# Altium PCB CM5IO.PcbDoc (part 3 of 4)
Units mm, origin at the board's own origin, x right, y up, seen from the top; angles counter-clockwise.
Board outline 160 x 90 mm, 4 copper layers (F.Cu, In1.Cu, In2.Cu, B.Cu); 76 components, 212 nets, 672 pads, 703 vias.
Unrouted connection lines stored in the file: 4.
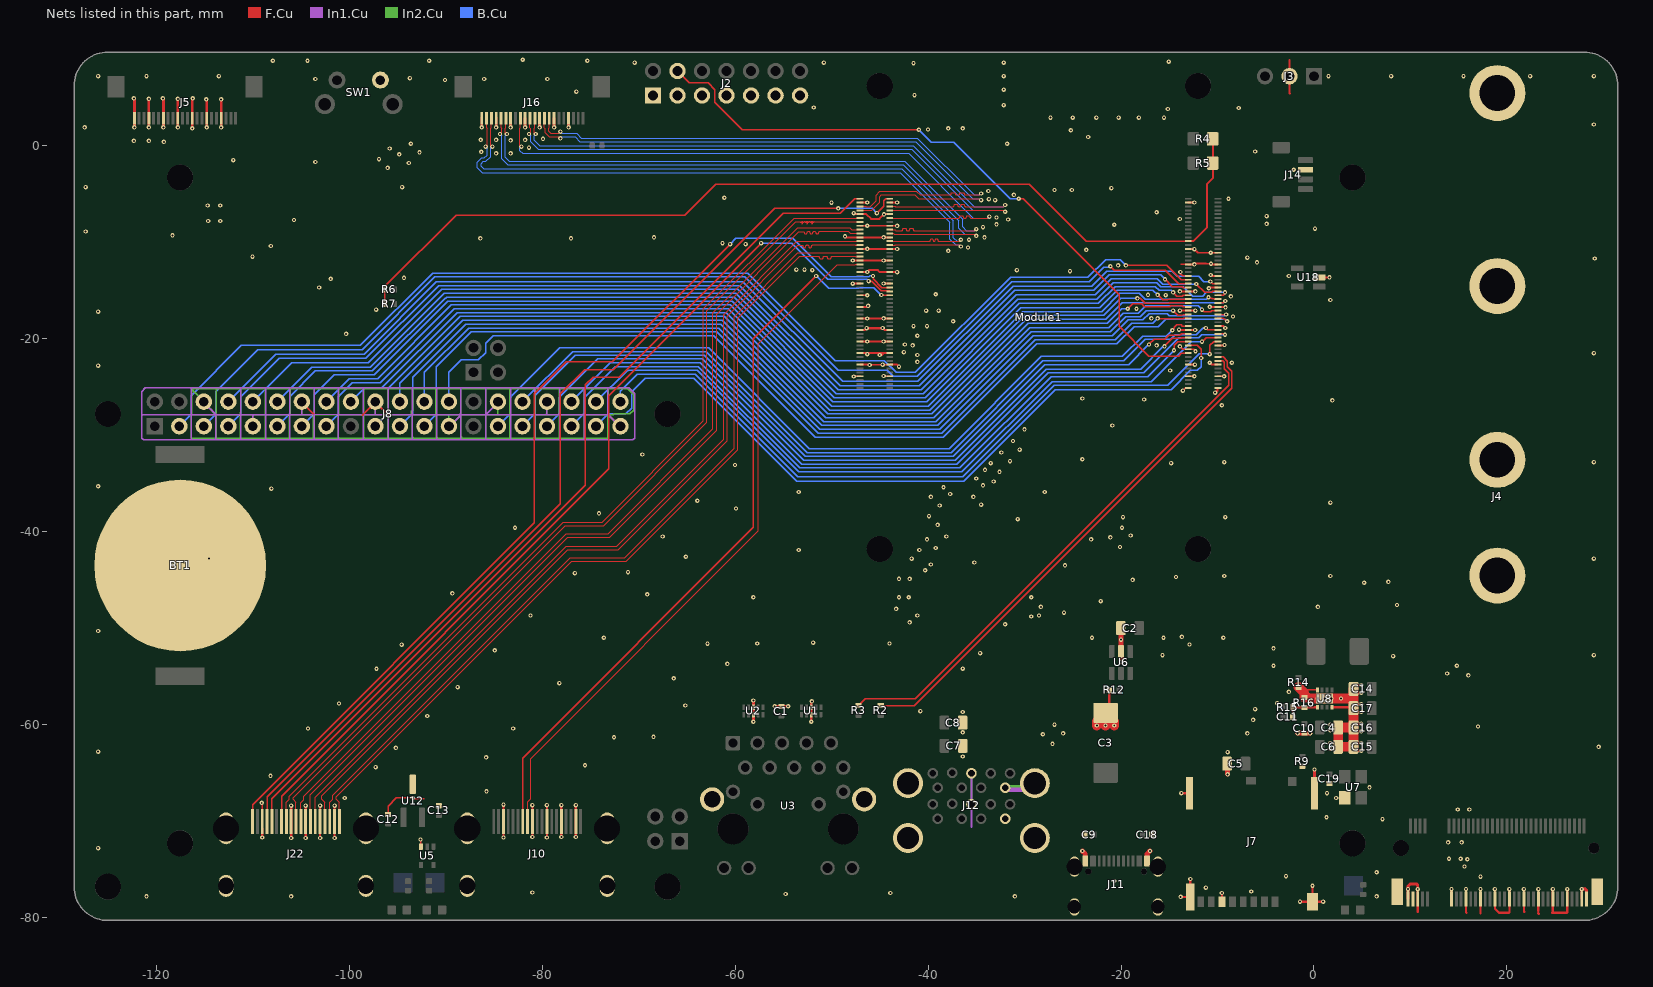
[diagram p4: the nets of this part, all layers, seen from the top]

## Via types
v1: diameter 0.45, hole 0.2, F.Cu to B.Cu, tented both sides, 703 vias

## Nets (pads, with @x,y where several pads share a name; then routed paths per layer and width w, separated by ;. In a path a pad name is that pad's centre, name@x,y a point inside that pad or via, vN(x,y) a via of type N, cw(c..) or ccw(c..) an arc to the next point about the centre after c; other vN are vias at no path point) (continued)
DPHY1_C_P: J16.9 Module1.189 | length 66.1
  F.Cu w0.127: J16.9@-82.25,2.85 -82.25,1.875 -82.31,1.815 -82.31,0.06 v1(-82.15,-0.1) ; Module1.189@-43.92,-7.5 -43.395,-7.5 -43.385,-7.51 -36.84,-7.51 -36.812,-7.507 -36.786,-7.498 -36.762,-7.483 -36.742,-7.463 -36.727,-7.439 -36.718,-7.413 -36.712,-7.357 -36.703,-7.331 -36.688,-7.307 -36.668,-7.287 -36.644,-7.272 -36.618,-7.263 -36.59,-7.26 -36.49,-7.26 -36.462,-7.263 -36.436,-7.272 -36.412,-7.287 -36.392,-7.307 -36.377,-7.331 -36.368,-7.357 -36.362,-7.413 -36.353,-7.439 -36.338,-7.463 -36.318,-7.483 -36.294,-7.498 -36.268,-7.507 -36.24,-7.51 -36.14,-7.51 -36.112,-7.507 -36.086,-7.498 -36.062,-7.483 -36.042,-7.463 -36.027,-7.439 -36.018,-7.413 -36.012,-7.357 -36.003,-7.331 -35.988,-7.307 -35.968,-7.287 -35.944,-7.272 -35.918,-7.263 -35.89,-7.26 -35.79,-7.26 -35.762,-7.263 -35.736,-7.272 -35.712,-7.287 -35.692,-7.307 -35.677,-7.331 -35.668,-7.357 -35.662,-7.413 -35.653,-7.439 -35.638,-7.463 -35.618,-7.483 -35.594,-7.498 -35.568,-7.507 -35.54,-7.51 -33.81,-7.51 v1(-33.65,-7.35)
  B.Cu w0.127: v1(-82.15,-0.1) -82.31,-0.26 -82.31,-0.521 -82.021,-0.81 -42.021,-0.81 -35.321,-7.51 -33.81,-7.51 v1(-33.65,-7.35)
DPHY1_D0_N: J16.2 Module1.175 | length 67.7
  F.Cu w0.127: v1(-85.85,-0.1) -85.69,0.06 -85.69,1.815 -85.75,1.875 J16.2@-85.75,2.85 ; Module1.175@-43.92,-10.3 -43.395,-10.3 -43.385,-10.29 -36.76,-10.29 v1(-36.6,-10.45)
  B.Cu w0.127: v1(-85.85,-0.1) -85.69,-0.26 -85.69,-0.971 -85.979,-1.26 -86.229,-1.26 -86.69,-1.721 -86.69,-2.279 -86.179,-2.79 -42.879,-2.79 -37.74,-7.929 -37.74,-9.679 -37.129,-10.29 -36.76,-10.29 v1(-36.6,-10.45)
DPHY1_D0_P: J16.3 Module1.177 | length 67.7
  F.Cu w0.127: J16.3@-85.25,2.85 -85.25,1.875 -85.31,1.815 -85.31,0.06 v1(-85.15,-0.1) ; Module1.177@-43.92,-9.9 -43.395,-9.9 -43.385,-9.91 -39.87,-9.91 -39.842,-9.907 -39.816,-9.898 -39.792,-9.883 -39.772,-9.863 -39.757,-9.839 -39.748,-9.813 -39.742,-9.757 -39.733,-9.731 -39.718,-9.707 -39.698,-9.687 -39.674,-9.673 -39.648,-9.663 -39.62,-9.66 -39.61,-9.66 -39.582,-9.663 -39.556,-9.673 -39.532,-9.687 -39.512,-9.707 -39.497,-9.731 -39.488,-9.757 -39.482,-9.813 -39.473,-9.839 -39.458,-9.863 -39.438,-9.883 -39.414,-9.898 -39.388,-9.907 -39.36,-9.91 -39.37,-9.91 -39.342,-9.907 -39.316,-9.898 -39.292,-9.883 -39.272,-9.863 -39.257,-9.839 -39.248,-9.813 -39.242,-9.757 -39.233,-9.731 -39.218,-9.707 -39.198,-9.687 -39.174,-9.673 -39.148,-9.663 -39.12,-9.66 -39.11,-9.66 -39.082,-9.663 -39.056,-9.673 -39.032,-9.687 -39.012,-9.707 -38.997,-9.731 -38.988,-9.757 -38.982,-9.813 -38.973,-9.839 -38.958,-9.863 -38.938,-9.883 -38.914,-9.898 -38.888,-9.907 -38.86,-9.91 -36.76,-9.91 v1(-36.6,-9.75)
  B.Cu w0.127: v1(-85.15,-0.1) -85.31,-0.26 -85.31,-1.129 -85.821,-1.64 -86.071,-1.64 -86.31,-1.879 -86.31,-2.121 -86.021,-2.41 -42.721,-2.41 -37.36,-7.771 -37.36,-9.521 -36.971,-9.91 -36.76,-9.91 v1(-36.6,-9.75)
DPHY1_D1_N: J16.5 Module1.181 | length 66.4
  F.Cu w0.127: v1(-84.35,1.2) -84.19,1.36 -84.19,1.815 -84.25,1.875 J16.5@-84.25,2.85 ; Module1.181@-43.96,-9.1 -43.589,-9.1 -43.579,-9.09 -43.479,-9.19 -35.16,-9.19 v1(-35,-9.35)
  B.Cu w0.127: v1(-84.35,1.2) -84.19,1.04 -84.19,-1.379 -83.579,-1.99 -42.579,-1.99 -36.79,-7.779 -36.79,-8.579 -36.179,-9.19 -35.16,-9.19 v1(-35,-9.35)
DPHY1_D1_P: J16.6 Module1.183 | length 66.3
  F.Cu w0.127: J16.6@-83.75,2.85 -83.75,1.875 -83.81,1.815 -83.81,1.36 v1(-83.65,1.2) ; Module1.183@-43.96,-8.7 -43.67,-8.7 -43.66,-8.71 -43.421,-8.71 -43.321,-8.81 -42.74,-8.81 -42.713,-8.807 -42.687,-8.798 -42.664,-8.783 -42.644,-8.764 -42.63,-8.741 -42.62,-8.715 -42.614,-8.66 -42.605,-8.634 -42.591,-8.611 -42.571,-8.592 -42.548,-8.577 -42.522,-8.568 -42.495,-8.565 -42.38,-8.565 -42.353,-8.568 -42.327,-8.577 -42.304,-8.592 -42.284,-8.611 -42.27,-8.634 -42.26,-8.66 -42.254,-8.715 -42.245,-8.741 -42.231,-8.764 -42.211,-8.783 -42.188,-8.798 -42.162,-8.807 -42.135,-8.81 -42.02,-8.81 -41.993,-8.807 -41.967,-8.798 -41.944,-8.783 -41.924,-8.764 -41.91,-8.741 -41.9,-8.715 -41.894,-8.66 -41.885,-8.634 -41.871,-8.611 -41.851,-8.592 -41.828,-8.577 -41.802,-8.568 -41.775,-8.565 -41.66,-8.565 -41.633,-8.568 -41.607,-8.577 -41.584,-8.592 -41.564,-8.611 -41.55,-8.634 -41.54,-8.66 -41.534,-8.715 -41.525,-8.741 -41.511,-8.764 -41.491,-8.783 -41.468,-8.798 -41.442,-8.807 -41.415,-8.81 -35.16,-8.81 v1(-35,-8.65)
  B.Cu w0.127: v1(-83.65,1.2) -83.81,1.04 -83.81,-1.221 -83.421,-1.61 -42.421,-1.61 -36.41,-7.621 -36.41,-8.421 -36.021,-8.81 -35.16,-8.81 v1(-35,-8.65)
DPHY1_D2_N: J16.11 Module1.193 | length 66.8
  F.Cu w0.127: v1(-81.35,1.2) -81.19,1.36 -81.19,1.815 -81.25,1.875 J16.11@-81.25,2.85 ; Module1.193@-43.92,-6.7 -43.395,-6.7 -43.385,-6.69 -32.16,-6.69 v1(-32,-6.85)
  B.Cu w0.127: v1(-81.35,1.2) -81.19,1.04 -81.19,0.421 -80.379,-0.39 -41.679,-0.39 -35.379,-6.69 -32.16,-6.69 v1(-32,-6.85)
DPHY1_D2_P: J16.12 Module1.195 | length 66.7
  F.Cu w0.127: J16.12@-80.75,2.85 -80.75,1.875 -80.81,1.815 -80.81,1.36 v1(-80.65,1.2) ; Module1.195@-43.92,-6.3 -43.395,-6.3 -43.385,-6.31 -37.41,-6.31 -37.382,-6.307 -37.356,-6.298 -37.332,-6.283 -37.312,-6.263 -37.297,-6.239 -37.288,-6.213 -37.282,-6.157 -37.273,-6.131 -37.258,-6.107 -37.238,-6.087 -37.214,-6.072 -37.188,-6.063 -37.16,-6.06 -37.06,-6.06 -37.032,-6.063 -37.006,-6.072 -36.982,-6.087 -36.962,-6.107 -36.947,-6.131 -36.938,-6.157 -36.932,-6.213 -36.923,-6.239 -36.908,-6.263 -36.888,-6.283 -36.864,-6.298 -36.838,-6.307 -36.81,-6.31 -36.71,-6.31 -36.682,-6.307 -36.656,-6.298 -36.632,-6.283 -36.612,-6.263 -36.597,-6.239 -36.588,-6.213 -36.582,-6.157 -36.573,-6.131 -36.558,-6.107 -36.538,-6.087 -36.514,-6.072 -36.488,-6.063 -36.46,-6.06 -36.36,-6.06 -36.332,-6.063 -36.306,-6.072 -36.282,-6.087 -36.262,-6.107 -36.247,-6.131 -36.238,-6.157 -36.232,-6.213 -36.223,-6.239 -36.208,-6.263 -36.188,-6.283 -36.164,-6.298 -36.138,-6.307 -36.11,-6.31 -32.16,-6.31 v1(-32,-6.15)
  B.Cu w0.127: v1(-80.65,1.2) -80.81,1.04 -80.81,0.579 -80.221,-0.01 -41.521,-0.01 -35.221,-6.31 -32.16,-6.31 v1(-32,-6.15)
DPHY1_D3_N: J16.14 Module1.194 | length 63.5
  F.Cu w0.127: J16.14@-79.75,2.85 -79.75,1.875 -79.69,1.815 -79.69,1.321 -79.279,0.91 -78.26,0.91 v1(-78.1,0.75) ; Module1.194@-47,-6.7 -46.475,-6.7 -46.465,-6.69 -45.821,-6.69 -45.01,-5.879 -45.01,-5.279 -44.821,-5.09 -41.379,-5.09 -40.979,-5.49 -34.66,-5.49 v1(-34.5,-5.65)
  B.Cu w0.127: v1(-78.1,0.75) -77.94,0.91 -76.579,0.91 -76.079,0.41 -41.279,0.41 -35.379,-5.49 -34.66,-5.49 v1(-34.5,-5.65)
DPHY1_D3_P: J16.15 Module1.196 | length 63.5
  F.Cu w0.127: J16.15@-79.25,2.85 -79.25,1.875 -79.31,1.815 -79.31,1.479 -79.121,1.29 -78.26,1.29 v1(-78.1,1.45) ; Module1.196@-47,-6.3 -46.475,-6.3 -46.465,-6.31 -45.979,-6.31 -45.39,-5.721 -45.39,-5.121 -44.979,-4.71 -41.221,-4.71 -40.821,-5.11 -37.74,-5.11 -37.712,-5.107 -37.686,-5.098 -37.662,-5.083 -37.642,-5.063 -37.627,-5.039 -37.618,-5.013 -37.612,-4.957 -37.603,-4.931 -37.588,-4.907 -37.568,-4.887 -37.544,-4.872 -37.518,-4.863 -37.49,-4.86 -37.29,-4.86 -37.262,-4.863 -37.236,-4.872 -37.212,-4.887 -37.192,-4.907 -37.177,-4.931 -37.168,-4.957 -37.162,-5.013 -37.153,-5.039 -37.138,-5.063 -37.118,-5.083 -37.094,-5.098 -37.068,-5.107 -37.04,-5.11 -36.84,-5.11 -36.812,-5.107 -36.786,-5.098 -36.762,-5.083 -36.742,-5.063 -36.727,-5.039 -36.718,-5.013 -36.712,-4.957 -36.703,-4.931 -36.688,-4.907 -36.668,-4.887 -36.644,-4.872 -36.618,-4.863 -36.59,-4.86 -36.39,-4.86 -36.362,-4.863 -36.336,-4.872 -36.312,-4.887 -36.292,-4.907 -36.277,-4.931 -36.268,-4.957 -36.262,-5.013 -36.253,-5.039 -36.238,-5.063 -36.218,-5.083 -36.194,-5.098 -36.168,-5.107 -36.14,-5.11 -34.66,-5.11 v1(-34.5,-4.95)
  B.Cu w0.127: v1(-78.1,1.45) -77.94,1.29 -76.421,1.29 -75.921,0.79 -41.121,0.79 -35.221,-5.11 -34.66,-5.11 v1(-34.5,-4.95)
EEPROM_nWP: J2.4 Module1.20 | length 67.9
  F.Cu w0.13: J2.4@-65.96,7.74 -64.72,6.5 -62.8,6.5 -62.1,5.8 -62.1,4.5 -59.25,1.65 v1(-40.95,1.65) ; v1(-30.6,-5.5) -30.15,-5.5 -20.2,-15.45 -20.2,-18.7 -17.1,-21.8 -14.04,-21.8 -13.74,-21.5 Module1.20@-13.08,-21.5
  B.Cu w0.13: v1(-40.95,1.65) -39.65,0.35 -37.35,0.35 -31.48,-5.52 -30.62,-5.52 v1(-30.6,-5.5)
ETH_LEDG: Module1.17 R2.2 | length 54.2
  F.Cu w0.13: R2.2@-44.9,-58.03 -41.408,-58.03 -8.5,-25.122 -8.5,-23.4 -9,-22.9 -9,-22.318 -9.418,-21.9 Module1.17@-10,-21.9
ETH_LEDY: Module1.15 R3.2 | length 55.4
  F.Cu w0.13: R3.2@-47.2,-58 -46.5,-57.3 -41.3,-57.3 -8.82,-24.82 -8.82,-23.58 -9.3,-23.1 -9.3,-22.47 -9.47,-22.3 Module1.15@-10,-22.3
FB: C11.2 R15.2 R16.1 U8.1 | length 3.5
  F.Cu w0.23: C11.2@-2.215,-59.2 R15.2@-2.215,-58.2 ; R15.2@-2.2,-58.2 -1,-58.2 U8.1@0.35,-58.2
GND: BT1.2 C1.2 C2.2 C3.2 C4.2 C5.2 C6.2 C7.2 C8.2 C9.2 C10.2 C12.2 C13.2 C14.2 C15.2 C16.2 C17.2 C18.2 C19.2 J2.1 J2.3 J2.5 J2.7 J2.9 J2.11 J2.13 J3.2 J4.1 J4.3 J4.9 J4.15 J4.21 J4.27 J4.33 J4.39 J4.45 J4.51 J4.57 J4.71 J4.73 J4.75 J4.M1 J4.M2 J4.M3 J4.M4 J4.S1 J4.S2 J5.1 J5.4 J5.7 J5.10 J5.13 J5.16 J5.19 J7.6 J7.11 J8.6 J8.9 J8.14 J8.20 J8.25 J8.30 J8.34 J8.39 J10.2 J10.5 J10.8 J10.11 J10.17 J10.SH1 J10.SH2 J10.SH3 J10.SH4 J11.A1 J11.A12 J11.B1 J11.B12 J11.S1 J12.10 J12.A4 J12.A7 J12.B4 J12.B7 J14.3 J16.1 J16.4 J16.7 J16.10 J16.13 J16.16 J16.19 J22.2 J22.5 J22.8 J22.11 J22.17 J22.SH1 J22.SH2 J22.SH3 J22.SH4 Module1.1 Module1.2 Module1.7 Module1.8 Module1.13 Module1.14 Module1.22 Module1.23 Module1.32 Module1.33 Module1.42 Module1.43 Module1.52 Module1.53 Module1.59 Module1.60 Module1.65 Module1.66 Module1.71 Module1.74 Module1.98 Module1.107 Module1.108 Module1.113 Module1.114 Module1.119 Module1.120 Module1.125 Module1.126 Module1.131 Module1.132 Module1.137 Module1.138 Module1.144 Module1.150 Module1.155 Module1.156 Module1.161 Module1.162 Module1.167 Module1.168 Module1.173 Module1.174 Module1.179 Module1.180 Module1.185 Module1.186 Module1.191 Module1.192 Module1.197 Module1.198 R9.2 R12.2 R14.2 R16.2 SW1.2 U1.3 U1.8 U2.3 U2.8 U3.19 U3.20 U5.3 U6.2 U7.2 U8.4 U8.8 U8.9 U12.3 U18.2 | length 766.8
  F.Cu w0.13: v1(-109.05,-68.113) -109,-68.163 J22.17@-109,-70.02 ; C12.2@-95.95,-69.315 -95.95,-68.45 -95.1,-67.6 v1(-93.4,-67.6) -93.3,-67.7 -92.215,-67.7 ; v1(-92.6,-71.9) -92.55,-71.95 U5.3@-92.55,-72.65 ; v1@-46.3,-16.7 v1(-46.2,-16.6) ; v1(-46.05,-22.725) -46.025,-22.7 -45.65,-22.7 Module1.113@-43.92,-22.7 ; v1(-13.855,-13.1) -13.855,-13.252 -13.607,-13.5 Module1.60@-13.08,-13.5 ; -13.8,-12.3 Module1.66@-13.04,-12.3 ; v1@-10.9,-22.4 v1(-10.8,-22.5) ; J7.6@-9.55,-78.865 -9.55,-77.768 v1(-9.55,-77.45) ; -9.5,-18.7 -9.4,-18.7 ; -1,-56.7 -0.7,-56.4 U8.8@0.35,-56.4
  F.Cu w0.2: v1(-48.6,-9.4) -48.5,-9.5 -47,-9.5 v1(-44.6,-9.5) Module1.179@-43.9,-9.5 ; v1(-47.8,-14.3) Module1.156@-47,-14.3 ; v1(-47.8,-11.9) -47,-11.9 v1(-44.6,-11.9) Module1.167@-43.92,-11.9 ; v1(-47.7,-23.93) -47.67,-23.9 Module1.108@-47,-23.9 ; v1(-47.7,-7) -47.6,-7.1 -47,-7.1 -46.4,-7.1 -45.9,-7.6 -45.046,-7.6 v1(-44.561,-7.115) -44.546,-7.1 Module1.191@-43.9,-7.1 ; Module1.114@-47,-22.7 -46.075,-22.7 v1(-46.05,-22.725) ; Module1.120@-47,-21.5 -44.6,-21.5 ; Module1.126@-47,-20.3 v1(-46.3,-20.3) ; Module1.132@-47,-19.1 -46.539,-19.1 v1(-46.354,-18.916) ; Module1.138@-47,-17.9 -46.31,-17.9 v1(-46.3,-17.91) -46.29,-17.9 v1(-44.6,-17.9) Module1.137@-43.9,-17.9 ; Module1.150@-47,-15.5 v1(-46.3,-15.5) ; Module1.162@-47,-13.1 v1(-46.3,-13.1) -46.1,-12.9 -45.2,-12.9 -45,-13.1 Module1.161@-43.92,-13.1 ; Module1.174@-47,-10.7 v1(-46.3,-10.7) Module1.173@-43.92,-10.7 ; Module1.186@-47,-8.3 v1(-46.3,-8.3) Module1.185@-43.92,-8.3 ; Module1.198@-47,-5.9 -46.31,-5.9 v1(-46.3,-5.89) ; Module1.144@-46.85,-16.7 v1@-46.3,-16.7 ; v1(-45,-21.7) -44.8,-21.7 -44.6,-21.5 ; v1(-44.7,-18.9) -44.5,-19.1 Module1.131@-43.92,-19.1 ; v1(-44.6,-23.87) -44.57,-23.9 Module1.107@-43.9,-23.9 ; v1@-44.6,-20.29 -44.59,-20.3 Module1.125@-43.92,-20.3 ; v1(-44.598,-14.293) -44.591,-14.3 Module1.155@-43.9,-14.3 ; Module1.119@-43.92,-21.5 -44.6,-21.5 ; Module1.113@-43.9,-22.7 -43.2,-22.7 v1(-43,-22.9) ; Module1.161@-43.9,-13.1 -43.21,-13.1 v1(-43.2,-13.11) ; Module1.173@-43.9,-10.7 -43.21,-10.7 v1(-43.2,-10.71) ; Module1.185@-43.9,-8.3 -43.21,-8.3 v1(-43.2,-8.31) ; Module1.197@-43.9,-5.9 -43.21,-5.9 v1(-43.2,-5.89) ; v1(-13.983,-19.074) -13.957,-19.1 -13.08,-19.1 -12.322,-19.1 v1(-12.319,-19.097) ; v1(-13.9,-20.8) -13.6,-21.1 -13.08,-21.1 -12.48,-21.1 v1(-12.273,-21.307) ; v1(-13.9,-17.1) -13.08,-17.1 v1(-12.3,-17.1) ; v1(-13.9,-15.1) -13.08,-15.1 v1(-12.3,-15.1) ; v1(-13.587,-25.393) Module1.2@-13.294,-25.1 ; Module1.8@-13.08,-23.9 v1(-12.4,-23.9) ; Module1.14@-13.08,-22.7 v1@-12.4,-22.7 ; Module1.66@-13.08,-12.3 v1(-12.4,-12.3) -12.3,-12.2 -11.2,-12.2 -11.163,-12.237 v1(-10.675,-12.237) -10.611,-12.3 Module1.65@-10,-12.3 ; Module1.74@-13.08,-10.7 -12.42,-10.7 v1(-12.4,-10.72) -12.02,-11.1 v1(-10.7,-11.1) Module1.71@-10,-11.1 ; Module1.98@-13.08,-5.9 -12.415,-5.9 v1(-12.4,-5.885) ; v1(-10.9,-14.78) -10.82,-14.7 Module1.53@-10,-14.7 ; v1(-10.8,-22.5) -10.6,-22.7 Module1.13@-10,-22.7 ; v1(-10.8,-16.7) -10,-16.7 -9.224,-16.7 v1(-9.173,-16.751) ; v1(-10.7,-13.4) -10.6,-13.5 Module1.59@-10,-13.5 ; v1@-10.181,-25.555 -10,-25.374 Module1.1@-10,-25.1 ; Module1.7@-10,-23.9 v1(-9.305,-23.9) ; Module1.23@-10,-20.7 -9.319,-20.7 v1(-9.281,-20.662) ; Module1.33@-10,-18.7 -9.5,-18.7 ; -9.4,-18.7 v1(-9.2,-18.9)
  F.Cu w0.23: v1@-120.8,4.9 v1(-120.75,4.85) J5.4@-120.75,2.85 v1(-120.75,1.9) ; v1(-109,-71.7) J22.17@-109,-70.8 ; v1(-106,-71.75) v1(-106,-68.4) ; J8.14@-104.89,-26.58 -103.7,-27.77 ; v1(-104.5,-71.75) v1(-104.5,-68.4) ; v1@-103,-71.8 v1(-103,-68.4) ; v1@-101.5,-71.8 v1(-101.5,-68.4) ; -98.6,-27.9 -98.59,-27.9 -97.27,-26.58 -96.05,-27.8 -96,-27.8 ; v1(-84,-71.7) v1(-84,-68.3) ; v1(-81,-71.65) v1(-81,-68.35) ; v1(-79.5,-71.7) v1(-79.5,-68.35) ; v1(-78,-71.65) v1(-78,-68.35) ; v1(-76.5,-71.65) v1(-76.5,-68.35) ; v1(-46.354,-18.916) -44.716,-18.916 v1(-44.7,-18.9) ; v1(-46.3,-20.3) -44.61,-20.3 v1@-44.6,-20.29 ; C3.2@-21.6,-58.775 -21.21,-58.385 R12.2@-21.21,-56.4 ; v1(-13.82,-77.85) -13.795,-77.875 J7.11@-12.82,-77.875 ; v1(-13.75,-67.1) -13.74,-67.11 J7.11@-12.9,-67.11 ; v1(-9.55,-77.45) -9.54,-77.46 J7.6@-9.54,-78.375 ; -2.54,8.86 J3.2@-2.54,7.2 -2.54,5.44 -2.5,5.4 ; v1(-1.45,-78.35) J7.11@-0.17,-78.35 ; J7.11@-0.16,-78.36 0.94,-78.36 v1(0.95,-78.35) ; J7.11@-0.15,-78.35 v1(-0.15,-76.7) ; U18.2@0.5,-13.65 v1(1.6,-13.65) ; U8.4@1.85,-58.2 C17.2@4,-58.2 ; v1(4.9,-62.7) 4.5,-62.7 C15.2@4.1,-62.3 4.5,-61.9 v1(4.9,-61.9) ; v1(4.9,-60.7) 4.5,-60.7 C16.2@4.1,-60.3 4.5,-59.9 v1(4.9,-59.9) ; v1(4.9,-58.7) 4.488,-58.7 C17.2@4.088,-58.3 4.488,-57.9 v1(4.9,-57.9) ; v1(4.9,-56.7) 4.5,-56.7 C14.2@4.1,-56.3 4.5,-55.9 v1(4.9,-55.9) ; J4.57@14.25,-78.075 v1(14.25,-77.05) ; v1(15.75,-77.05) J4.51@15.75,-78.075 15.75,-79.45 15.8,-79.5 ; 17.25,-79.55 J4.45@17.25,-78.075 ; v1(18.75,-77.05) J4.39@18.75,-78.075 18.75,-79.08 19.17,-79.5 20.2,-79.5 20.25,-79.45 J4.33@20.25,-78.075 v1(20.25,-77.05) ; v1(21.75,-77.05) J4.27@21.75,-78.075 21.75,-79.35 21.8,-79.4 ; 23.25,-79.55 23.3,-79.6 ; 23.25,-79.3 J4.21@23.25,-78.075 ; v1(24.75,-77.05) J4.15@24.75,-78.075 24.75,-79.45 24.7,-79.5 26.2,-79.5 26.25,-79.45 J4.9@26.25,-78.075 v1(26.25,-77.05) ; J4.3@27.75,-78.075 v1(27.75,-77.05)
  F.Cu w0.3: v1(-122.3,4.9) -122.25,4.85 J5.1@-122.25,2.85 v1(-122.25,1.9) ; v1(-119.3,4.9) -119.25,4.85 J5.7@-119.25,2.85 v1(-119.25,1.9) ; v1@-117.8,4.9 v1(-117.75,4.85) J5.10@-117.75,2.85 v1(-117.75,1.9) ; v1(-116.25,1.8) J5.13@-116.25,2.85 -116.25,4.85 v1(-116.2,4.9) ; v1(-114.8,4.8) -114.75,4.75 J5.16@-114.75,2.85 v1(-114.75,1.9) ; v1(-113.25,1.9) J5.19@-113.25,2.85 v1(-113.25,4.8) ; v1(-86.25,1.9) J16.1@-86.25,2.85 ; v1(-84.75,1.9) J16.4@-84.75,2.85 ; v1(-83.25,1.9) J16.7@-83.25,2.85 ; v1(-81.75,1.9) J16.10@-81.75,2.85 ; v1(-80.25,1.9) J16.13@-80.25,2.85 ; v1(-78.75,1.9) J16.16@-78.75,2.85 ; v1(-77.25,1.9) J16.19@-77.25,2.85 ; v1(-58.1,-59.7) U2.8@-58.1,-58.97 v1(-58.1,-57.5) ; v1(-55.9,-58.1) -55.885,-58.115 -55.2,-58.115 -54.78,-58.115 -54.765,-58.1 v1(-54.5,-58.1) ; v1(-52.1,-59.7) U1.8@-52.1,-58.97 U1.3@-52.1,-58.2 -52.1,-57.66 v1(-52.032,-57.593) ; J7.11@-12.82,-78.375 v1(-12.82,-76) ; J7.11@0.06,-67.61 v1(0.06,-64.65) ; J4.75@9.75,-78.075 v1(9.75,-77.05) 9.75,-76.75 10,-76.5 10.6,-76.5 10.75,-76.65 v1(10.75,-77.05) J4.71@10.75,-78.075 10.75,-79.35 ; v1(27.75,-77.05) 28.05,-77.05 28.1,-77 28.25,-77.15 J4.1@28.25,-78.075
  F.Cu w0.5: BT1.2@-117.5,-42.8 v1(-114.5,-42.8) ; v1(-24,-73.1) -23.7,-73.4 J11.B12@-23.7,-74.145 ; v1(-20,-53.5) U6.2@-20,-52.425 v1(-20,-51.2) C2.2@-20,-50 ; J11.B1@-17.3,-74.145 -17.3,-73.4 v1(-17,-73.1) ; v1(-8.95,-65.15) C5.2@-8.95,-64.087 ; v1(-1.7,-60.9) -1.67,-60.87 C10.2@-1,-60.87 ; C10.2@-0.97,-60.9 v1(-0.4,-60.9)
  F.Cu w1: v1(-22.5,-60.1) -22.5,-59.675 C3.2@-21.6,-58.775 ; v1(-21.6,-60.1) C3.2@-21.6,-58.775 ; v1(-20.7,-60.1) -20.7,-59.675 C3.2@-21.6,-58.775 ; R14.2@-1.6,-56.1 -1,-56.7 -1,-57.23 -0.546,-57.23 -0.476,-57.3 v1(1.1,-57.3) 4.1,-57.3 ; C14.2@4.1,-56.3 4.1,-57.3 ; C16.2@4.1,-60.3 4.1,-58.3 4.1,-57.3 ; C16.2@4.1,-60.3 C15.2@4.1,-62.3 C6.2@2.5,-62.3 C4.2@2.5,-60.3 C16.2@4.1,-60.3
  In1.Cu w0.13: J8.6@-115.05,-26.63 -113.78,-27.9 ; -113.8,-27.9 -113.8,-30.4 -113.9,-30.5 ; J8.9@-109.97,-29.17 -109.97,-27.968 -109.902,-27.9 ; -106.1,-27.9 -106.15,-27.85 ; J8.14@-104.89,-26.63 -104.89,-27.832 -104.9,-27.842 -104.9,-27.9 ; J8.20@-97.27,-26.63 -97.27,-27.832 -97.202,-27.9 ; J8.25@-89.65,-29.17 -88.38,-27.9 ; -88.55,-27.9 -88.4,-27.75 ; J8.30@-84.57,-26.63 -85.84,-27.9 ; J8.34@-79.49,-26.63 -79.49,-27.832 -79.422,-27.9 ; -78.15,-27.75 -78.25,-27.85 -78.25,-27.9 ; -73.2,-27.9 -73.2,-25.1 ; J8.39@-71.87,-29.17 -73.14,-27.9 -78.25,-27.9 ; -121.5,-27.9 -121.5,-27.4 -121.5,-25.5 -121.1,-25.1 -116.3,-25.1 ; -121.5,-27.9 -113.1,-27.9 -108.65,-27.9 -104.9,-27.9 ; -121.5,-27.9 -121.5,-30.3 -121.3,-30.5 -116.3,-30.5 ; -116.3,-30.5 -113.9,-30.5 ; -116.3,-30.5 -116.35,-30.45 -116.35,-30.05 -116.35,-25.75 -116.35,-25.15 -116.3,-25.1 ; -116.3,-25.1 -111.3,-25.1 ; -113.9,-30.5 -111.2,-30.5 ; -111.3,-25.1 -111.25,-25.15 -111.25,-25.9 -111.25,-29.9 -111.25,-30.45 -111.2,-30.5 ; -111.3,-25.1 -108.6,-25.1 ; -111.2,-30.5 -108.6,-30.5 ; -108.6,-30.5 -106.1,-30.5 ; -108.6,-30.5 -108.65,-30.45 -108.65,-30.05 -108.65,-25.75 -108.65,-25.15 -108.6,-25.1 ; -108.6,-25.1 -106.1,-25.1 ; -106.15,-27.85 -106.15,-30.45 -106.1,-30.5 ; -106.15,-27.85 -106.15,-25.45 -106.15,-25.15 -106.1,-25.1 ; -106.1,-30.5 -103.7,-30.5 ; -106.1,-25.1 -103.6,-25.1 ; -104.9,-27.9 -103.568,-27.882 -101.1,-27.85 -101.05,-27.9 -93.45,-27.9 -88.3,-27.9 -85.84,-27.9 ; -103.7,-30.5 -101.1,-30.5 ; -103.7,-30.5 -103.6,-30.4 -103.6,-25.55 -103.6,-25.1 ; -103.6,-25.1 -101.1,-25.1 ; -101.1,-30.5 -98.6,-30.5 ; -101.1,-30.5 -101.1,-29.95 -101.1,-25.1 ; -101.1,-25.1 -98.5,-25.1 ; -98.6,-30.5 -96,-30.5 ; -98.6,-30.5 -98.55,-30.45 -98.55,-29.95 -98.55,-25.8 -98.55,-25.15 -98.5,-25.1 ; -98.5,-25.1 -96,-25.1 ; -96,-30.5 -93.5,-30.5 ; -96,-30.5 -95.95,-30.45 -95.95,-30.05 -95.95,-25.95 -95.95,-25.15 -96,-25.1 ; -96,-25.1 -93.4,-25.1 ; -93.5,-30.5 -90.9,-30.5 ; -93.5,-30.5 -93.45,-30.45 -93.45,-29.9 -93.45,-25.95 -93.45,-25.15 -93.4,-25.1 ; -93.4,-25.1 -90.8,-25.1 ; -90.9,-30.5 -90.9,-27.9 -90.9,-26 -90.9,-25.2 -90.8,-25.1 ; -90.9,-30.5 -88.4,-30.5 ; -90.8,-25.1 -88.4,-25.1 ; -88.4,-30.5 -88.4,-30.1 -88.4,-25.85 -88.4,-25.1 ; -88.4,-30.5 -85.8,-30.5 ; -88.4,-25.1 -85.9,-25.1 ; -85.9,-25.1 -83.3,-25.1 ; -85.9,-25.1 -85.84,-25.16 -85.84,-27.9 ; -85.84,-27.9 -78.25,-27.9 ; -85.84,-27.9 -85.84,-29.89 -85.84,-30.46 -85.8,-30.5 ; -85.8,-30.5 -83.3,-30.5 ; -83.3,-30.5 -83.25,-30.45 -83.25,-29.85 -83.25,-25.15 -83.3,-25.1 ; -83.3,-30.5 -80.8,-30.5 ; -83.3,-25.1 -80.8,-25.1 ; -80.8,-30.5 -78.1,-30.5 ; -80.8,-30.5 -80.75,-30.45 -80.75,-27.75 -80.75,-25.55 -80.75,-25.15 -80.8,-25.1 ; -80.8,-25.1 -78.2,-25.1 ; -78.2,-25.1 -78.15,-25.15 -78.15,-25.8 -78.15,-30.05 -78.15,-30.45 -78.1,-30.5 ; -78.2,-25.1 -75.8,-25.1 ; -78.1,-30.5 -75.6,-30.5 ; -75.8,-25.1 -73.2,-25.1 ; -75.8,-25.1 -75.65,-25.25 -75.65,-25.9 -75.65,-29.95 -75.65,-30.45 -75.6,-30.5 ; -75.6,-30.5 -70.6,-30.5 -70.4,-30.3 -70.4,-26.503 -70.4,-25.7 -71,-25.1 -73.2,-25.1
  In1.Cu w0.2: -35.5,-70.6 J12.B7@-35.5,-65.25
  In1.Cu w0.5: J12.B4@-32,-66.75 J12.10@-29.41,-66.75
  In2.Cu w0.13: J8.6@-115.05,-26.63 -114.2,-27.48 -114.2,-27.5 -113.8,-27.9 -113.3,-27.9 ; J8.6@-115.05,-26.5 -116.3,-25.25 ; J8.9@-109.97,-29.17 -109.97,-27.968 -109.902,-27.9 ; -106.1,-27.9 -106.1,-25.65 -106.1,-25.2 ; J8.14@-104.89,-26.63 -104.89,-27.832 -104.822,-27.9 ; -101.15,-27.9 -101.1,-27.95 -101.1,-30 -101.1,-30.2 -101,-30.3 ; -101.1,-27.9 -101.05,-27.85 -101.05,-27.3 -101.05,-25.5 -101.05,-25.25 -101,-25.2 ; J8.20@-97.27,-26.63 -97.27,-27.77 -97.3,-27.8 -97.3,-27.9 ; -93.5,-27.95 -93.55,-27.9 ; J8.25@-89.65,-29.17 -89.65,-27.95 -89.6,-27.9 ; -89.65,-27.968 -89.7,-27.918 -89.7,-27.9 ; -84.6,-27.9 -84.6,-27.862 -84.57,-27.832 J8.30@-84.57,-26.63 ; -83.35,-30.25 -83.35,-27.9 -83.35,-25.25 -83.3,-25.2 ; -79.6,-27.9 -79.49,-27.79 J8.34@-79.49,-26.63 ; -73.14,-27.9 J8.39@-71.87,-29.17 ; -116.35,-27.88 -116.3,-27.83 -116.3,-25.25 ; -116.35,-27.88 -116.35,-30.25 -116.3,-30.3 -113.8,-30.3 ; -116.35,-27.88 -113.78,-27.88 ; -116.3,-25.25 -116.25,-25.2 -113.8,-25.2 ; -113.8,-30.3 -113.78,-30.28 -113.78,-29.62 -113.78,-27.88 ; -113.8,-30.3 -111.2,-30.3 ; -113.8,-25.2 -113.78,-25.22 -113.78,-27.88 ; -113.8,-25.2 -111.2,-25.2 ; -113.78,-27.88 -113.32,-27.88 -113.3,-27.9 ; -113.3,-27.9 -108.7,-27.9 ; -111.2,-30.3 -108.7,-30.3 ; -111.2,-30.3 -111.3,-30.2 -111.3,-29.95 -111.3,-27.9 -111.3,-27.7 -111.25,-27.65 -111.25,-25.7 -111.25,-25.25 -111.2,-25.2 ; -111.2,-25.2 -108.7,-25.2 ; -108.7,-30.3 -106.2,-30.3 ; -108.7,-30.3 -108.7,-29.9 -108.7,-27.9 ; -108.7,-27.9 -108.7,-25.45 -108.7,-25.3 -108.7,-25.2 ; -108.7,-27.9 -106.2,-27.9 ; -108.7,-25.2 -106.1,-25.2 ; -106.2,-30.3 -106.2,-27.9 ; -106.2,-30.3 -103.7,-30.3 ; -106.2,-27.9 -103.7,-27.9 ; -106.1,-25.2 -103.6,-25.2 ; -103.7,-30.3 -103.7,-30.1 -103.7,-27.9 ; -103.7,-30.3 -101,-30.3 ; -103.7,-27.9 -103.6,-27.9 ; -103.6,-27.9 -103.6,-25.75 -103.6,-25.2 ; -103.6,-27.9 -101.2,-27.9 -98.5,-27.9 ; -103.6,-25.2 -101,-25.2 ; -101,-30.3 -98.4,-30.3 ; -101,-25.2 -98.5,-25.2 ; -98.5,-27.9 -98.5,-29.95 -98.5,-30.2 -98.4,-30.3 ; -98.5,-27.9 -98.5,-25.2 ; -98.5,-27.9 -97.3,-27.9 ; -98.5,-25.2 -96,-25.2 ; -98.4,-30.3 -95.9,-30.3 ; -97.3,-27.9 -96,-27.9 ; -96,-27.9 -93.55,-27.9 ; -96,-27.9 -96,-29.75 -96,-30.2 -95.9,-30.3 ; -96,-27.9 -96,-25.2 ; -96,-25.2 -93.4,-25.2 ; -95.9,-30.3 -93.3,-30.3 ; -93.55,-27.9 -93.55,-27.55 -93.4,-27.4 -93.4,-25.9 -93.4,-25.2 ; -93.55,-27.9 -93.4,-27.9 ; -93.4,-27.9 -91,-27.9 ; -93.4,-27.9 -93.45,-27.95 -93.45,-29.7 -93.45,-30.15 -93.3,-30.3 ; -93.4,-25.2 -91,-25.2 ; -93.3,-30.3 -90.8,-30.3 ; -91,-27.9 -89.7,-27.9 ; -91,-27.9 -91,-25.5 -91,-25.2 ; -91,-27.9 -91,-28 -90.95,-28.05 -90.95,-29.85 -90.95,-30.15 -90.8,-30.3 ; -91,-25.2 -88.5,-25.2 ; -90.8,-30.3 -88.3,-30.3 ; -89.7,-27.9 -89.6,-27.9 ; -89.6,-27.9 -88.55,-27.9 -85.85,-27.9 ; -88.5,-25.2 -85.8,-25.2 ; -88.5,-25.2 -88.4,-25.3 -88.4,-25.55 -88.4,-27.9 -88.4,-30.1 -88.3,-30.2 -88.3,-30.3 ; -88.3,-30.3 -85.8,-30.3 ; -85.85,-27.9 -85.85,-30.05 -85.85,-30.25 -85.8,-30.3 ; -85.85,-27.9 -85.85,-25.8 -85.85,-25.25 -85.8,-25.2 ; -85.85,-27.9 -72.6,-27.9 -72.5,-27.8 -70.95,-27.8 -70.9,-27.8 -70.5,-27.4 -70.5,-26.403 -70.5,-25.8 -71.1,-25.2 -73.2,-25.2 ; -85.8,-30.3 -80.7,-30.3 ; -85.8,-25.2 -83.3,-25.2 ; -83.3,-25.2 -80.7,-25.2 ; -80.7,-30.3 -78.2,-30.3 ; -80.7,-30.3 -80.7,-27.9 -80.7,-25.2 ; -80.7,-25.2 -78.2,-25.2 ; -78.2,-30.3 -78.2,-30.1 -78.2,-27.9 -78.2,-25.8 -78.2,-25.2 ; -78.2,-30.3 -75.6,-30.3 ; -78.2,-25.2 -75.7,-25.2 ; -75.7,-25.2 -73.2,-25.2 ; -75.7,-25.2 -75.65,-25.25 -75.65,-25.55 -75.65,-27.9 -75.65,-30.25 -75.6,-30.3 ; -75.6,-30.3 -73.2,-30.3 -73.2,-29.9 -73.2,-27.9 -73.2,-27.75 -73.15,-27.7 -73.15,-26 -73.15,-25.25 -73.2,-25.2
  In2.Cu w0.2: J12.A7@-35.5,-68.45 J12.B7@-35.5,-65.25
  In2.Cu w0.5: J12.B4@-32,-66.75 -31.75,-66.5 -29.66,-66.5 J12.10@-29.41,-66.75
  other v1: -121,-77.8 -106,-77.8 -31,-77.8 6.5,-77.8 -54.75,-77.55 -43.9,-77.45 -81,-77.4 -6.5,-77.3 17.25,-77.05 23.25,-77.05 -11.2,-76.9 -20.7,-76.2 17.25,-75.75 -2.9,-75.7 6.5,-75.3 15.6,-74.7 15.9,-73.95 14,-73.9 15.2,-73.9 -126,-72.8 13.9,-72.2 15.3,-72.2 -103,-71.75 -101.5,-71.75 7.1,-69.8 1.3,-69.6 14.9,-68.8 16.1,-68.8 -100.45,-67.612 2.3,-67.6 1.35,-67.1 -85.75,-66.913 5.75,-66.5 -108.15,-65.312 -97.25,-64.413 -75.55,-64.213 -85.8,-63.4 -36.4,-63.3 -8.95,-62.85 -126,-62.8 1.7,-62.5 -95.15,-62.412 29.5,-62.3 -27.1,-62 1.7,-61.9 -72.55,-61.312 -68.45,-61.275 -28.1,-61 -26,-60.9 -6.9,-60.9 -36.4,-60.8 1.7,-60.6 -104.25,-60.4 -83,-60.4 17,-60.2 -26.9,-60 1.7,-60 -6.3,-59.5 -91.9,-59.1 -36.4,-58.7 -40.8,-58.6 -6.1,-58.4 -65.15,-58.025 -101.05,-57.813 -3.8,-57.8 0.4,-57.3 1.8,-57.3 2.8,-57.3 -2.6,-56.6 -88.75,-56.112 -78.2,-55.7 -66.35,-55.212 16,-54.9 13.8,-54.7 -97.15,-54.213 -36.4,-54.2 -4.2,-53.9 14.8,-53.9 -60.8,-53.7 8.2,-52.9 -15.7,-52.8 29,-52.8 -34.6,-52.6 -84.9,-52.3 -4.2,-52.1 -94.55,-51.713 -12.9,-51.7 -62.85,-51.613 -57.7,-51.6 -44,-51.6 -51.9,-51.5 -73.6,-51 -23,-51 -15.6,-51 -9.4,-51 -13.7,-50.9 -126,-50.3 -32,-49.6 -41.9,-49.4 -29.3,-48.8 -81.2,-48.7 -41.1,-48.7 -28.5,-48.7 -25.9,-48.4 -43.3,-48 -28.3,-47.8 0.4,-47.8 8.6,-47.6 -22.1,-47.2 -58.1,-46.8 -43,-46.8 -42,-46.8 -29.3,-46.8 -69.1,-46.5 -89.3,-46.4 5.2,-45.3 7.7,-45.2 -18.8,-45 -43,-44.9 -41.9,-44.9 -14.3,-44.7 -9.3,-44.6 1.7,-44.6 -76.6,-44.3 -71.1,-44.2 -40.3,-44 -25.8,-43.5 -39.7,-43.4 -35.2,-43.2 -41.7,-42.8 29,-42.8 -65.1,-42.6 -53.4,-41.9 -40.9,-41.9 -39.2,-41.7 -20.1,-41.6 -40.1,-40.8 -23.1,-40.8 -21.1,-40.6 -67.5,-40.5 -38.1,-40.5 -19,-40.4 -82.8,-39.6 -19.9,-39.6 -39,-39.3 -30.7,-38.7 -19.8,-38.5 -9.2,-38.5 -39.9,-38.4 -74.1,-38.1 -59.9,-37.6 -38.8,-37.3 -34.5,-37.2 1.7,-37 -63.9,-36.8 -39.7,-36.4 -35.3,-36.4 -37.7,-36.1 -53.4,-35.9 -27.9,-35.9 -108.05,-35.55 -38.4,-35.4 -126,-35.3 -34.3,-35.2 -33.2,-34.8 -35,-34.5 -32.6,-33.8 -34.1,-33.6 -60,-33.1 -33.5,-32.9 -14.8,-32.9 -9.3,-32.8 29,-32.8 -31.5,-32.7 -24,-32.5 -69.6,-32 -32.4,-31.8 -30.5,-31.5 -31.2,-30.6 -30,-29.4 -20.9,-29 -9.55,-26.9 1.9,-26.4 -17.6,-26.3 -24,-26.2 -10.25,-25.6 -14.9,-23.3 -126,-22.8 -44.7,-22.7 -12.35,-22.7 -8.518,-22.5 -41.1,-22.4 -41.1,-21.7 -46.3,-21.6 29,-21.5 -42.5,-21.4 -41.6,-20.7 -16.3,-20.7 -42.4,-20.6 -44.6,-20.3 -41.1,-19.7 -100.3,-19.5 -41.5,-18.7 -40.1,-18.7 -37.4,-18.2 -16.85,-17.901 -8.4,-17.7 -126,-17.2 -40.2,-17.1 -38.9,-17.1 -97.2,-17 -18.4,-16.9 1.7,-16 -8.62,-15.614 -15.366,-15.493 -17.2,-15.46 -39.2,-15.4 -103.1,-14.7 -101.9,-13.8 -94.3,-13.7 -2.6,-13.5 -25.28,-13 -52,-12.9 -30.8,-12.9 -53.65,-12.85 -52.8,-12.85 -20.3,-12.4 -5.9,-12.1 29.1,-11.7 -6.9,-11.6 -110,-11.5 -37.9,-10.9 -23.6,-10.8 -35.85,-10.55 -108.1,-10.4 -58.9,-10.21 -61.3,-10.1 -35.75,-9.75 -86.4,-9.6 -77,-9.6 -68.4,-9.5 -34.15,-9.5 -118.3,-9.3 -127.3,-8.9 0.1,-8.6 -34.3,-8.45 -20.7,-8.2 -32.9,-8.15 -4.9,-8.1 -114.6,-7.8 -113.35,-7.8 -105.7,-7.7 -31.7,-7.65 -13.9,-7.6 -32.9,-7.45 -4.9,-7.3 -16.3,-6.9 -114.65,-6.2 -113.35,-6.2 -50,-5.9 -33.05,-5.65 -33.7,-5.55 -8.855,-5.5 -61.1,-5.4 -31.1,-5.1 -33.75,-4.7 -26.9,-4.6 -25.1,-4.6 -21,-4.4 -127.3,-4.3 -94.5,-4.3 -2.1,-2.5 -96,-2.3 -93.8,-1.8 -103.5,-1.7 -112,-1.5 -96.9,-1.4 -94.8,-0.9 -84.75,-0.8 -83.25,-0.8 -92.7,-0.7 -86.3,-0.645 -6.1,-0.6 -95.8,-0.3 -81.35,-0.2 -93.6,0.2 -31.8,0.2 -119.2,0.4 -122.3,0.5 -120.75,0.5 -83.25,0.55 -86.35,0.6 -84.75,0.6 -81.75,0.6 -79.9,0.7 -23.4,0.9 -25.2,1.6 -40,1.68 -37.9,1.8 -36.4,1.8 -127.4,1.9 29,2.2 -27.3,2.9 -25,2.9 -22.55,2.9 -20.25,2.9 -18.15,2.9 -15.55,2.9 -15.15,3.8 -7.8,3.9 -51.842,3.955 -32.15,4.2 -41.4,5.238 -76.45,5.6 -32.15,5.8 -90.05,6.8 -103.5,6.9 -86,6.9 -79.45,6.9 -93.7,7 -126,7.2 -121,7.2 -113.5,7.2 -32.15,7.2 1.5,7.2 8,7.2 15.5,7.2 22.4,7.2 29,7.2 -41.5,8.55 -70.4,8.6 -50.8,8.6 -32.15,8.6 -15.05,8.7 -107.9,8.8 -104.3,8.8 -91.7,8.8 -75.3,8.8 -82,8.9
GPIO2: J8.3 Module1.58 | length 122.2
  F.Cu w0.13: v1(-19.5,-12.4) -15.28,-12.4 -13.78,-13.9 Module1.58@-13.08,-13.9
  B.Cu w0.13: J8.3@-117.59,-29.07 -116.35,-27.83 -116.35,-25.9 -111.15,-20.7 -98.85,-20.7 -91.35,-13.2 -58.7,-13.2 -49.62,-22.28 -44.526,-22.28 -43.306,-23.5 -41.3,-23.5 -31.45,-13.65 -23.45,-13.65 -21.6,-11.8 -20.1,-11.8 v1(-19.5,-12.4)
GPIO3: J8.5 Module1.56 | length 119.5
  F.Cu w0.13: v1(-21.1,-12.5) -20.7,-12.9 -15.4,-12.9 -14,-14.3 Module1.56@-13.08,-14.3
  B.Cu w0.13: J8.5@-115.05,-29.07 -113.8,-27.82 -113.8,-25.5 -109.45,-21.15 -98.65,-21.15 -91.1,-13.6 -59,-13.6 -49.3,-23.3 -44.2,-23.3 -43.6,-23.9 -41.1,-23.9 -31.3,-14.1 -23.3,-14.1 -21.8,-12.6 -21.2,-12.6 v1(-21.1,-12.5)
GPIO4: J8.7 Module1.54 | length 116.1
  F.Cu w0.13: v1(-15.44,-13.853) -14.683,-14.61 -13.665,-14.61 -13.575,-14.7 Module1.54@-13.08,-14.7
  B.Cu w0.13: J8.7@-112.51,-29.07 -111.2,-27.76 -111.2,-26 -107.25,-22.05 -98.25,-22.05 -90.7,-14.5 -59.5,-14.5 -49.1,-24.9 -40.9,-24.9 -31,-15 -22.8,-15 -21.2,-13.4 -15.893,-13.4 v1(-15.44,-13.853)
GPIO5: J8.29 Module1.34 | length 85.6
  F.Cu w0.13: v1(-14.685,-19.13) -14.46,-18.905 -14.46,-18.826 -14.218,-18.584 -13.748,-18.584 -13.632,-18.7 Module1.34@-13.08,-18.7
  B.Cu w0.13: J8.29@-84.57,-29.07 -83.35,-27.85 -83.35,-26.125 -78.185,-20.96 -62.74,-20.96 -52.3,-31.4 -37.8,-31.4 -28.25,-21.85 -19.85,-21.85 -17.734,-19.734 -15.289,-19.734 v1(-14.685,-19.13)
GPIO6: J8.31 Module1.30 | length 82.7
  F.Cu w0.13: v1(-17.1,-20.6) -16.541,-20.041 -15.467,-20.041 -15.064,-19.638 -13.905,-19.638 -13.837,-19.57 -13.77,-19.57 -13.7,-19.5 Module1.30@-13.08,-19.5
  B.Cu w0.13: J8.31@-82.03,-29.07 -80.75,-27.79 -80.75,-25.9 -76.57,-21.72 -63.18,-21.72 -52.7,-32.2 -37.4,-32.2 -27.9,-22.7 -19.2,-22.7 v1(-17.1,-20.6)
GPIO7: J8.26 Module1.37 | length 99.3
  F.Cu w0.13: Module1.37@-10,-17.9 -9.425,-17.9 -9.35,-17.975 -9.225,-17.975 v1(-9,-18.2)
  B.Cu w0.13: J8.26@-89.65,-26.58 -89.65,-23.7 ; J8.26@-89.65,-26.53 -89.65,-23.7 ; v1(-9,-18.2) -9.225,-17.975 -15.383,-17.975 -16.152,-18.744 -18.644,-18.744 -20.45,-20.55 -28.75,-20.55 -38.4,-30.2 -51.7,-30.2 -62.18,-19.72 -85.07,-19.72 -85.85,-20.5 -85.85,-21.45 -86.6,-22.2 -88.35,-22.2 -89.65,-23.5 -89.65,-23.7
GPIO8: J8.24 Module1.39 | length 101.5
  F.Cu w0.13: Module1.39@-10,-17.5 v1(-9.1,-17.5)
  B.Cu w0.13: J8.24@-92.19,-26.63 -92.19,-23.49 ; J8.24@-92.19,-26.53 -92.19,-23.49 ; v1(-9.1,-17.5) -9.225,-17.625 -14.975,-17.625 -15.199,-17.401 -17.075,-17.401 -17.735,-18.061 -19.261,-18.061 -20.9,-19.7 -29.1,-19.7 -38.8,-29.4 -51.2,-29.4 -61.7,-18.9 -87.6,-18.9 -92.19,-23.49
GPIO9: J8.21 Module1.40 | length 97.7
  F.Cu w0.13: v1(-14.6,-17.1) -14.11,-17.59 -13.665,-17.59 -13.575,-17.5 Module1.40@-13.08,-17.5
  B.Cu w0.13: J8.21@-94.73,-29.07 -93.4,-27.74 -93.4,-27.7 -93.4,-24 -87.9,-18.5 -61.5,-18.5 -51,-29 -39,-29 -29.3,-19.3 -21.1,-19.3 -19.531,-17.731 -18.001,-17.731 -17.37,-17.1 v1(-14.6,-17.1)
GPIO10: J8.19 Module1.44 | length 99.9
  F.Cu w0.13: v1(-19.3,-16.9) -18.8,-16.4 -17.875,-16.4 -17.575,-16.7 -14.925,-16.7 -14.835,-16.61 -13.665,-16.61 -13.575,-16.7 Module1.44@-13.08,-16.7
  B.Cu w0.13: J8.19@-97.27,-29.07 -96,-27.8 -96,-25.2 -88.5,-17.7 -61.1,-17.7 -50.6,-28.2 -39.4,-28.2 -29.6,-18.4 -21.4,-18.4 -19.9,-16.9 v1(-19.3,-16.9)
GPIO11: J8.23 Module1.38 | length 95.4
  F.Cu w0.13: v1(-16.2,-17.891) -16.167,-17.924 -13.532,-17.924 -13.508,-17.9 Module1.38@-13.08,-17.9
  B.Cu w0.13: J8.23@-92.19,-29.07 -90.95,-27.83 -90.95,-22.9 -87.35,-19.3 -61.9,-19.3 -51.4,-29.8 -38.6,-29.8 -28.9,-20.1 -20.6,-20.1 -18.891,-18.391 -16.7,-18.391 v1(-16.2,-17.891)
GPIO12: J8.32 Module1.31 | length 83.9
  F.Cu w0.13: v1(-11.2,-18.9) -11,-19.1 Module1.31@-10,-19.1
  B.Cu w0.13: J8.32@-82.03,-26.53 -76.84,-21.34 -76.79,-21.34 -62.96,-21.34 -52.5,-31.8 -37.6,-31.8 -28.1,-22.3 -19.7,-22.3 -17.464,-20.064 -14.831,-20.064 -14.353,-19.587 -12.205,-19.587 -11.518,-18.9 v1(-11.2,-18.9)
GPIO13: J8.33 Module1.28 | length 79.9
  F.Cu w0.13: v1(-15.5,-20.8) -14.668,-19.968 -13.768,-19.968 -13.7,-19.9 Module1.28@-13.08,-19.9
  B.Cu w0.13: J8.33@-79.49,-29.07 -78.2,-27.78 -78.2,-26.087 -74.213,-22.1 -63.4,-22.1 -52.9,-32.6 -37.2,-32.6 -27.75,-23.15 -17.95,-23.15 -15.6,-20.8 v1(-15.5,-20.8)
GPIO14: J8.8 Module1.55 | length 117.2
  F.Cu w0.13: v1(-10.743,-14.078) -10.702,-14.078 -10.48,-14.3 Module1.55@-10,-14.3
  B.Cu w0.13: J8.8@-112.51,-26.53 -107.58,-21.6 -98.45,-21.6 -90.95,-14.1 -59.2,-14.1 -48.86,-24.44 -41.04,-24.44 -31.15,-14.55 -23.05,-14.55 -21.5,-13 -14.7,-13 -14.155,-13.545 -11.955,-13.545 -11.422,-14.078 v1(-10.743,-14.078)
GPIO15: J8.10 Module1.51 | length 114.5
  F.Cu w0.13: v1(-12.2,-14.343) -11.338,-15.205 -10.585,-15.205 -10.48,-15.1 Module1.51@-10,-15.1
  B.Cu w0.13: J8.10@-109.97,-26.53 -105.94,-22.5 -98,-22.5 -90.4,-14.9 -59.7,-14.9 -49.3,-25.3 -40.7,-25.3 -30.85,-15.45 -22.65,-15.45 -21,-13.8 -16.218,-13.8 -15.675,-14.343 v1(-12.2,-14.343)
GPIO16: J8.36 Module1.29 | length 80.1
  F.Cu w0.13: Module1.29@-10,-19.5 -9.325,-19.5 v1(-9.225,-19.6)
  B.Cu w0.13: J8.36@-76.95,-26.53 -72.92,-22.5 -63.6,-22.5 -53.1,-33 -37,-33 -27.55,-23.55 -17.65,-23.55 -14.017,-19.917 -11.932,-19.917 -11.615,-19.6 v1(-9.225,-19.6)
GPIO17: J8.11 Module1.50 | length 110.5
  F.Cu w0.13: v1(-14.6,-15.2) -14.21,-15.59 -13.665,-15.59 -13.575,-15.5 Module1.50@-13.08,-15.5
  B.Cu w0.13: J8.11@-107.43,-29.07 -106.1,-27.74 -106.1,-25.95 -103.5,-23.35 -97.6,-23.35 -90.05,-15.8 -90,-15.8 -89.9,-15.7 -60.1,-15.7 -49.7,-26.1 -40.3,-26.1 -30.55,-16.35 -22.35,-16.35 -20.6,-14.6 -16.426,-14.6 -16.022,-15.003 -14.797,-15.003 v1(-14.6,-15.2)
GPIO18: J8.12 Module1.49 | length 113.6
  F.Cu w0.13: Module1.49@-10,-15.5 -9.382,-15.5 -9.225,-15.343 v1(-9.225,-15.2)
  B.Cu w0.13: J8.12@-107.43,-26.53 -103.85,-22.95 -97.8,-22.95 -90.15,-15.3 -59.9,-15.3 -49.5,-25.7 -40.5,-25.7 -30.7,-15.9 -22.5,-15.9 -20.8,-14.2 -16.285,-14.2 -15.875,-14.61 -13.57,-14.61 -12.59,-15.59 -11.532,-15.59 -11.142,-15.2 v1(-9.225,-15.2)
GPIO19: J8.35 Module1.26 | length 77.5
  F.Cu w0.13: v1(-14.5,-21.205) -14.5,-20.7 -14.1,-20.3 Module1.26@-13.08,-20.3
  B.Cu w0.13: J8.35@-76.95,-29.07 -75.68,-27.8 -75.65,-27.8 -75.65,-26.112 -72.438,-22.9 -63.8,-22.9 -53.3,-33.4 -36.7,-33.4 -27.25,-23.95 -17.245,-23.95 v1(-14.5,-21.205)
GPIO20: J8.38 Module1.27 | length 75.9
  F.Cu w0.13: v1(-11.6,-20.31) -11.19,-19.9 Module1.27@-10,-19.9
  B.Cu w0.13: J8.38@-74.41,-26.53 -71.19,-23.31 -71.09,-23.31 -71.08,-23.3 -63.937,-23.3 -53.419,-33.819 -36.519,-33.819 -27.15,-24.45 -16.85,-24.45 -12.71,-20.31 v1(-11.6,-20.31)
GPIO21: J8.40 Module1.25 | length 75.6
  F.Cu w0.13: v1(-10.8,-21.6) -10.8,-20.7 -10.4,-20.3 Module1.25@-10,-20.3
  B.Cu w0.13: J8.40@-71.87,-26.63 -71.87,-25.428 ; J8.40@-71.87,-26.53 -71.87,-25.428 ; v1(-10.8,-21.6) -10.82,-21.58 -11.88,-21.58 -15.132,-24.832 -26.932,-24.832 -36.4,-34.3 -53.5,-34.3 -64.1,-23.7 -70.142,-23.7 -71.87,-25.428
GPIO22: J8.15 Module1.46 | length 104.7
  F.Cu w0.13: v1(-18.3,-15.82) -17.982,-15.82 -17.488,-16.313 -14.994,-16.313 -14.961,-16.28 Module1.46@-13.1,-16.28
  B.Cu w0.13: J8.15@-102.35,-29.07 -101.1,-27.82 -101.1,-27.8 -101.1,-26 -99.675,-24.575 -96.775,-24.575 -89.1,-16.9 -60.7,-16.9 -50.2,-27.4 -39.8,-27.4 -30,-17.6 -21.8,-17.6 -20.02,-15.82 v1(-18.3,-15.82)
GPIO23: J8.16 Module1.47 | length 106.2
  F.Cu w0.13: v1(-10.929,-15.712) -10.831,-15.81 -10.617,-15.81 -10.562,-15.865 -10.361,-15.865 -10.326,-15.9 Module1.47@-9.96,-15.9
  B.Cu w0.13: J8.16@-102.35,-26.53 -99.97,-24.15 -97.05,-24.15 -89.4,-16.5 -60.5,-16.5 -50,-27 -40,-27 -30.2,-17.2 -22,-17.2 -20.11,-15.31 -18.09,-15.31 -17.463,-15.937 -11.154,-15.937 v1(-10.929,-15.712)
GPIO24: J8.18 Module1.45 | length 104.5
  F.Cu w0.13: Module1.45@-10,-16.3 -9.4,-16.3 v1(-9.2,-16.1)
  B.Cu w0.13: J8.18@-99.81,-26.53 -98.44,-25.16 -96.66,-25.16 -88.8,-17.3 -60.9,-17.3 -50.4,-27.8 -39.6,-27.8 -29.8,-18 -21.6,-18 -19.88,-16.28 -9.38,-16.28 v1(-9.2,-16.1)
GPIO25: J8.22 Module1.41 | length 101
  F.Cu w0.13: v1(-11.6,-17) -11.375,-17.225 -10.703,-17.225 -10.578,-17.1 Module1.41@-10,-17.1
  B.Cu w0.13: J8.22@-94.73,-26.63 -94.73,-24.63 ; J8.22@-94.73,-26.53 -94.73,-24.63 ; v1(-11.6,-17) -11.99,-16.61 -17.41,-16.61 -18.19,-17.39 -19.79,-17.39 -21.25,-18.85 -29.45,-18.85 -39.2,-28.6 -50.8,-28.6 -61.3,-18.1 -88.2,-18.1 -94.73,-24.63
GPIO26: J8.37 Module1.24 | length 78.5
  F.Cu w0.13: Module1.24@-13.08,-20.7 -12.073,-20.7 -11.7,-21.073 v1(-11.7,-22)
  B.Cu w0.13: J8.37@-74.41,-29.07 -73.14,-27.8 -71.3,-27.8 -70.7,-27.2 -70.7,-25.5 -69.3,-24.1 -64.3,-24.1 -53.6,-34.8 -36.3,-34.8 -26.8,-25.3 -14.8,-25.3 -12.8,-23.3 -12.1,-23.3 -11.7,-22.9 v1(-11.7,-22)
GPIO27: J8.13 Module1.48 | length 107.9
  F.Cu w0.13: v1(-16.2,-15.46) -15.677,-15.983 -15.131,-15.983 -15.073,-15.925 Module1.48@-13.105,-15.925
  B.Cu w0.13: J8.13@-104.89,-29.07 -103.6,-27.78 -103.6,-25.8 -101.55,-23.75 -97.4,-23.75 -89.75,-16.1 -60.3,-16.1 -49.85,-26.55 -40.15,-26.55 -30.4,-16.8 -22.2,-16.8 -20.37,-14.97 -16.69,-14.97 v1(-16.2,-15.46)
GPIO_VREF: Module1.78 R4.2 R5.2 R6.1 R7.1 | length 103.9
  F.Cu w0.13: R7.1@-96.3,-16.4 R6.1@-96.3,-14.9 ; R6.1@-96.285,-14.9 -96.285,-14.585 -88.9,-7.2 -65.2,-7.2 -62,-4 -29.5,-4 -23.6,-9.9 Module1.78@-13.08,-9.9
  F.Cu w0.2: Module1.78@-13.08,-9.9 -12.5,-9.9 -11.1,-8.5 -11.1,-4 -10.475,-3.375 -10.475,-1.8 R4.2@-10.475,0.7
HDMI0_CEC: J22.13 Module1.151 | length 95.9
  F.Cu w0.13: J22.13@-107,-70.02 -107,-67.4 -73.1,-33.5 -73.1,-25.9 v1(-57.3,-10.1) ; v1(-46.147,-14.047) -45.853,-14.047 -44.84,-15.06 Module1.151@-43.96,-15.06
  B.Cu w0.13: v1(-57.3,-10.1) -54.1,-10.1 -50.378,-13.822 -46.372,-13.822 v1(-46.147,-14.047)
HDMI0_CK_N: J22.12 Module1.190 | length 93.5
  F.Cu w0.127: J22.12@-106.5,-70.02 -106.5,-68.07 -106.19,-67.76 -106.19,-67.421 -77.779,-39.01 -73.779,-39.01 -63.29,-28.521 -63.29,-16.921 -53.879,-7.51 -47.535,-7.51 -47.525,-7.5 Module1.190@-47,-7.5
HDMI0_CK_P: J22.10 Module1.188 | length 95.3
  F.Cu w0.127: J22.10@-105.5,-70.02 -105.5,-68.07 -105.81,-67.76 -105.81,-67.579 -77.621,-39.39 -73.621,-39.39 -62.91,-28.679 -62.91,-17.11 -53.7,-7.9 -53.265,-7.9 cw(c-53.265,-7.996) -53.169,-7.996 cw(c-53.074,-7.996) -53.074,-8.092 -53.008,-8.092 cw(c-53.008,-7.996) -52.912,-7.996 cw(c-52.817,-7.996) -52.817,-7.9 -52.751,-7.9 cw(c-52.751,-7.996) -52.655,-7.996 cw(c-52.56,-7.996) -52.56,-8.092 -52.494,-8.092 cw(c-52.494,-7.996) -52.398,-7.996 cw(c-52.303,-7.996) -52.303,-7.9 -52.237,-7.9 cw(c-52.237,-7.996) -52.141,-7.996 cw(c-52.046,-7.996) -52.046,-8.092 -51.98,-8.092 cw(c-51.98,-7.996) -51.884,-7.996 cw(c-51.789,-7.996) -51.789,-7.9 -51.723,-7.9 -50.355,-7.9 Module1.188@-47,-7.9
HDMI0_D0_N: J22.9 Module1.184 | length 92
  F.Cu w0.127: J22.9@-105,-70.02 -105,-68.11 -104.69,-67.8 -104.69,-67.421 -77.479,-40.21 -73.146,-40.21 -62.29,-29.354 -62.29,-17.321 -53.479,-8.51 -48.121,-8.51 -47.921,-8.71 -47.535,-8.71 -47.525,-8.7 Module1.184@-47,-8.7
HDMI0_D0_P: J22.7 Module1.182 | length 91.9
  F.Cu w0.127: J22.7@-104,-70.02 -104,-67.269 -77.321,-40.59 -72.989,-40.59 -61.91,-29.511 -61.91,-17.46 -53.387,-8.937 -52.862,-8.937 -52.847,-8.961 -52.838,-8.987 -52.832,-9.043 -52.823,-9.069 -52.808,-9.093 -52.788,-9.113 -52.764,-9.128 -52.738,-9.137 -52.71,-9.14 -52.66,-9.14 -52.632,-9.137 -52.606,-9.128 -52.582,-9.113 -52.562,-9.093 -52.547,-9.069 -52.538,-9.043 -52.532,-8.987 -52.523,-8.961 -52.508,-8.937 -52.488,-8.917 -52.464,-8.902 -52.438,-8.893 -52.41,-8.89 -52.36,-8.89 -52.332,-8.893 -52.306,-8.902 -52.282,-8.917 -52.262,-8.937 -52.247,-8.961 -52.238,-8.987 -52.232,-9.043 -52.223,-9.069 -52.208,-9.093 -52.188,-9.113 -52.164,-9.128 -52.138,-9.137 -52.11,-9.14 -52.06,-9.14 -52.032,-9.137 -52.006,-9.128 -51.982,-9.113 -51.962,-9.093 -51.947,-9.069 -51.938,-9.043 -51.932,-8.987 -51.923,-8.961 -51.908,-8.937 -51.888,-8.917 -51.864,-8.902 -51.838,-8.893 -51.81,-8.89 -51.76,-8.89 -51.732,-8.893 -51.706,-8.902 -51.682,-8.917 -51.662,-8.937 -51.647,-8.961 -51.638,-8.987 -51.632,-9.043 -51.623,-9.069 -51.608,-9.093 -51.588,-9.113 -51.564,-9.128 -51.538,-9.137 -51.51,-9.14 -51.46,-9.14 -51.432,-9.137 -51.406,-9.128 -51.382,-9.113 -51.362,-9.093 -51.347,-9.069 -51.338,-9.043 -51.332,-8.987 -51.323,-8.961 -51.308,-8.937 -51.288,-8.917 -51.264,-8.902 -51.238,-8.893 -51.21,-8.89 -50.646,-8.89 -49.154,-8.89 -48.279,-8.89 -48.079,-9.09 -47.535,-9.09 -47.525,-9.1 Module1.182@-47,-9.1
HDMI0_D1_N: J22.6 Module1.178 | length 90.4
  F.Cu w0.127: J22.6@-103.5,-70.02 -103.5,-67.531 -77.479,-41.51 -72.279,-41.51 -61.19,-30.421 -61.19,-17.521 -53.579,-9.91 -47.535,-9.91 -47.525,-9.9 Module1.178@-47,-9.9
HDMI0_D1_P: J22.4 Module1.176 | length 90.4
  F.Cu w0.127: J22.4@-102.5,-70.02 -102.5,-68.07 -102.81,-67.76 -102.81,-67.379 -77.321,-41.89 -72.121,-41.89 -60.81,-30.579 -60.81,-17.66 -53.494,-10.344 -52.998,-10.344 -52.981,-10.371 -52.97,-10.402 -52.963,-10.466 -52.952,-10.496 -52.935,-10.523 -52.912,-10.546 -52.885,-10.563 -52.855,-10.574 -52.823,-10.577 -52.81,-10.577 -52.778,-10.574 -52.748,-10.563 -52.72,-10.546 -52.698,-10.523 -52.681,-10.496 -52.67,-10.466 -52.663,-10.402 -52.652,-10.371 -52.635,-10.344 -52.612,-10.321 -52.585,-10.304 -52.555,-10.294 -52.523,-10.29 -52.51,-10.29 -52.478,-10.294 -52.448,-10.304 -52.42,-10.321 -52.398,-10.344 -52.381,-10.371 -52.37,-10.402 -52.363,-10.466 -52.352,-10.496 -52.335,-10.523 -52.312,-10.546 -52.285,-10.563 -52.255,-10.574 -52.223,-10.577 -52.21,-10.577 -52.178,-10.574 -52.148,-10.563 -52.12,-10.546 -52.098,-10.523 -52.081,-10.496 -52.07,-10.466 -52.063,-10.402 -52.052,-10.371 -52.035,-10.344 -52.012,-10.321 -51.985,-10.304 -51.955,-10.294 -51.923,-10.29 -47.535,-10.29 -47.525,-10.3 Module1.176@-47,-10.3
HDMI0_D2_N: J22.3 Module1.172 | length 88.8
  F.Cu w0.127: J22.3@-102,-70.02 -102,-68.07 -101.69,-67.76 -101.69,-67.321 -77.079,-42.71 -71.443,-42.71 -60.09,-31.357 -60.09,-17.721 -53.479,-11.11 -47.535,-11.11 -47.525,-11.1 Module1.172@-47,-11.1
HDMI0_D2_P: J22.1 Module1.170 | length 88.8
  F.Cu w0.127: J22.1@-101,-70.02 -101,-68.07 -101.31,-67.76 -101.31,-67.479 -76.921,-43.09 -71.285,-43.09 -59.71,-31.515 -59.71,-17.879 -53.291,-11.46 -51.39,-11.46 -51.362,-11.463 -51.336,-11.472 -51.312,-11.487 -51.292,-11.507 -51.277,-11.531 -51.268,-11.557 -51.262,-11.613 -51.253,-11.639 -51.238,-11.663 -51.218,-11.683 -51.194,-11.698 -51.168,-11.707 -51.14,-11.71 -50.98,-11.71 -50.952,-11.707 -50.926,-11.698 -50.902,-11.683 -50.882,-11.663 -50.867,-11.639 -50.858,-11.613 -50.852,-11.557 -50.843,-11.531 -50.828,-11.507 -50.808,-11.487 -50.784,-11.472 -50.758,-11.463 -50.73,-11.46 -50.57,-11.46 -50.542,-11.463 -50.516,-11.472 -50.492,-11.487 -50.472,-11.507 -50.457,-11.531 -50.448,-11.557 -50.442,-11.613 -50.433,-11.639 -50.418,-11.663 -50.398,-11.683 -50.374,-11.698 -50.348,-11.707 -50.32,-11.71 -50.16,-11.71 -50.132,-11.707 -50.106,-11.698 -50.082,-11.683 -50.062,-11.663 -50.047,-11.639 -50.038,-11.613 -50.032,-11.557 -50.023,-11.531 -50.008,-11.507 -49.988,-11.487 -49.964,-11.472 -49.938,-11.463 -49.91,-11.46 -47.52,-11.46 -47.48,-11.5 Module1.170@-47,-11.5
HDMI0_HOTPLUG: J22.19 Module1.153 | length 102.3
  F.Cu w0.13: J22.19@-110,-70.02 -110,-68.3 -80.8,-39.1 -80.8,-25.7 -77.5,-22.4 -72.7,-22.4 v1(-60.5,-10.2) ; v1(-45.7,-13.5) -45.7,-13.818 -44.806,-14.713 -44.424,-14.713 -44.412,-14.7 Module1.153@-43.92,-14.7
  B.Cu w0.13: v1(-60.5,-10.2) -59.9,-9.6 -54,-9.6 -50.038,-13.562 -46.08,-13.562 -46.018,-13.5 v1(-45.7,-13.5)
HDMI0_SCL: J22.15 Module1.200 | length 95.2
  F.Cu w0.13: J22.15@-108,-70.02 -108,-67.7 -75.5,-35.2 -75.5,-24.8 -74.7,-24 -72,-24 -55,-7 -49.1,-7 -47.6,-5.5 Module1.200@-47,-5.5
HDMI0_SDA: J22.16 Module1.199 | length 100.2
  F.Cu w0.13: J22.16@-108.5,-70.02 -108.5,-67.5 -78.1,-37.1 -78.1,-25.7 -75.6,-23.2 -72.6,-23.2 -55.9,-6.5 v1(-49.3,-6.5) ; v1(-45.3,-7) -44.6,-6.3 -44.6,-5.7 -44.4,-5.5 Module1.199@-43.92,-5.5
  B.Cu w0.13: v1(-49.3,-6.5) -45.8,-6.5 v1(-45.3,-7)
HDMI1_CEC: J10.13 Module1.149 | length 77.7
  F.Cu w0.13: J10.13@-82,-70.02 -82,-63.468 -58.1,-39.568 -58.1,-20 v1(-51.6,-13.5) ; v1(-44.837,-15.48) -44.817,-15.5 Module1.149@-43.92,-15.5
  B.Cu w0.13: v1(-51.6,-13.5) -50.3,-14.8 -47.2,-14.8 -47.1,-14.7 -45.617,-14.7 v1(-44.837,-15.48)
HDMI1_CK_N: J10.12 Module1.166 | length 73.4
  F.Cu w0.127: J10.12@-81.5,-70.02 -81.5,-68.01 -81.19,-67.7 -81.19,-63.521 -57.59,-39.921 -57.59,-20.521 -49.409,-12.34 -47.52,-12.34 -47.48,-12.3 Module1.166@-47,-12.3